# Altium PCB extensionboard.PcbDoc
Units mm, origin at the board's own origin, x right, y up, seen from the top; angles counter-clockwise.
Board outline 95 x 100 mm, 2 copper layers (Top Layer, Bottom Layer); 96 components, 80 nets, 406 pads, 34 vias.
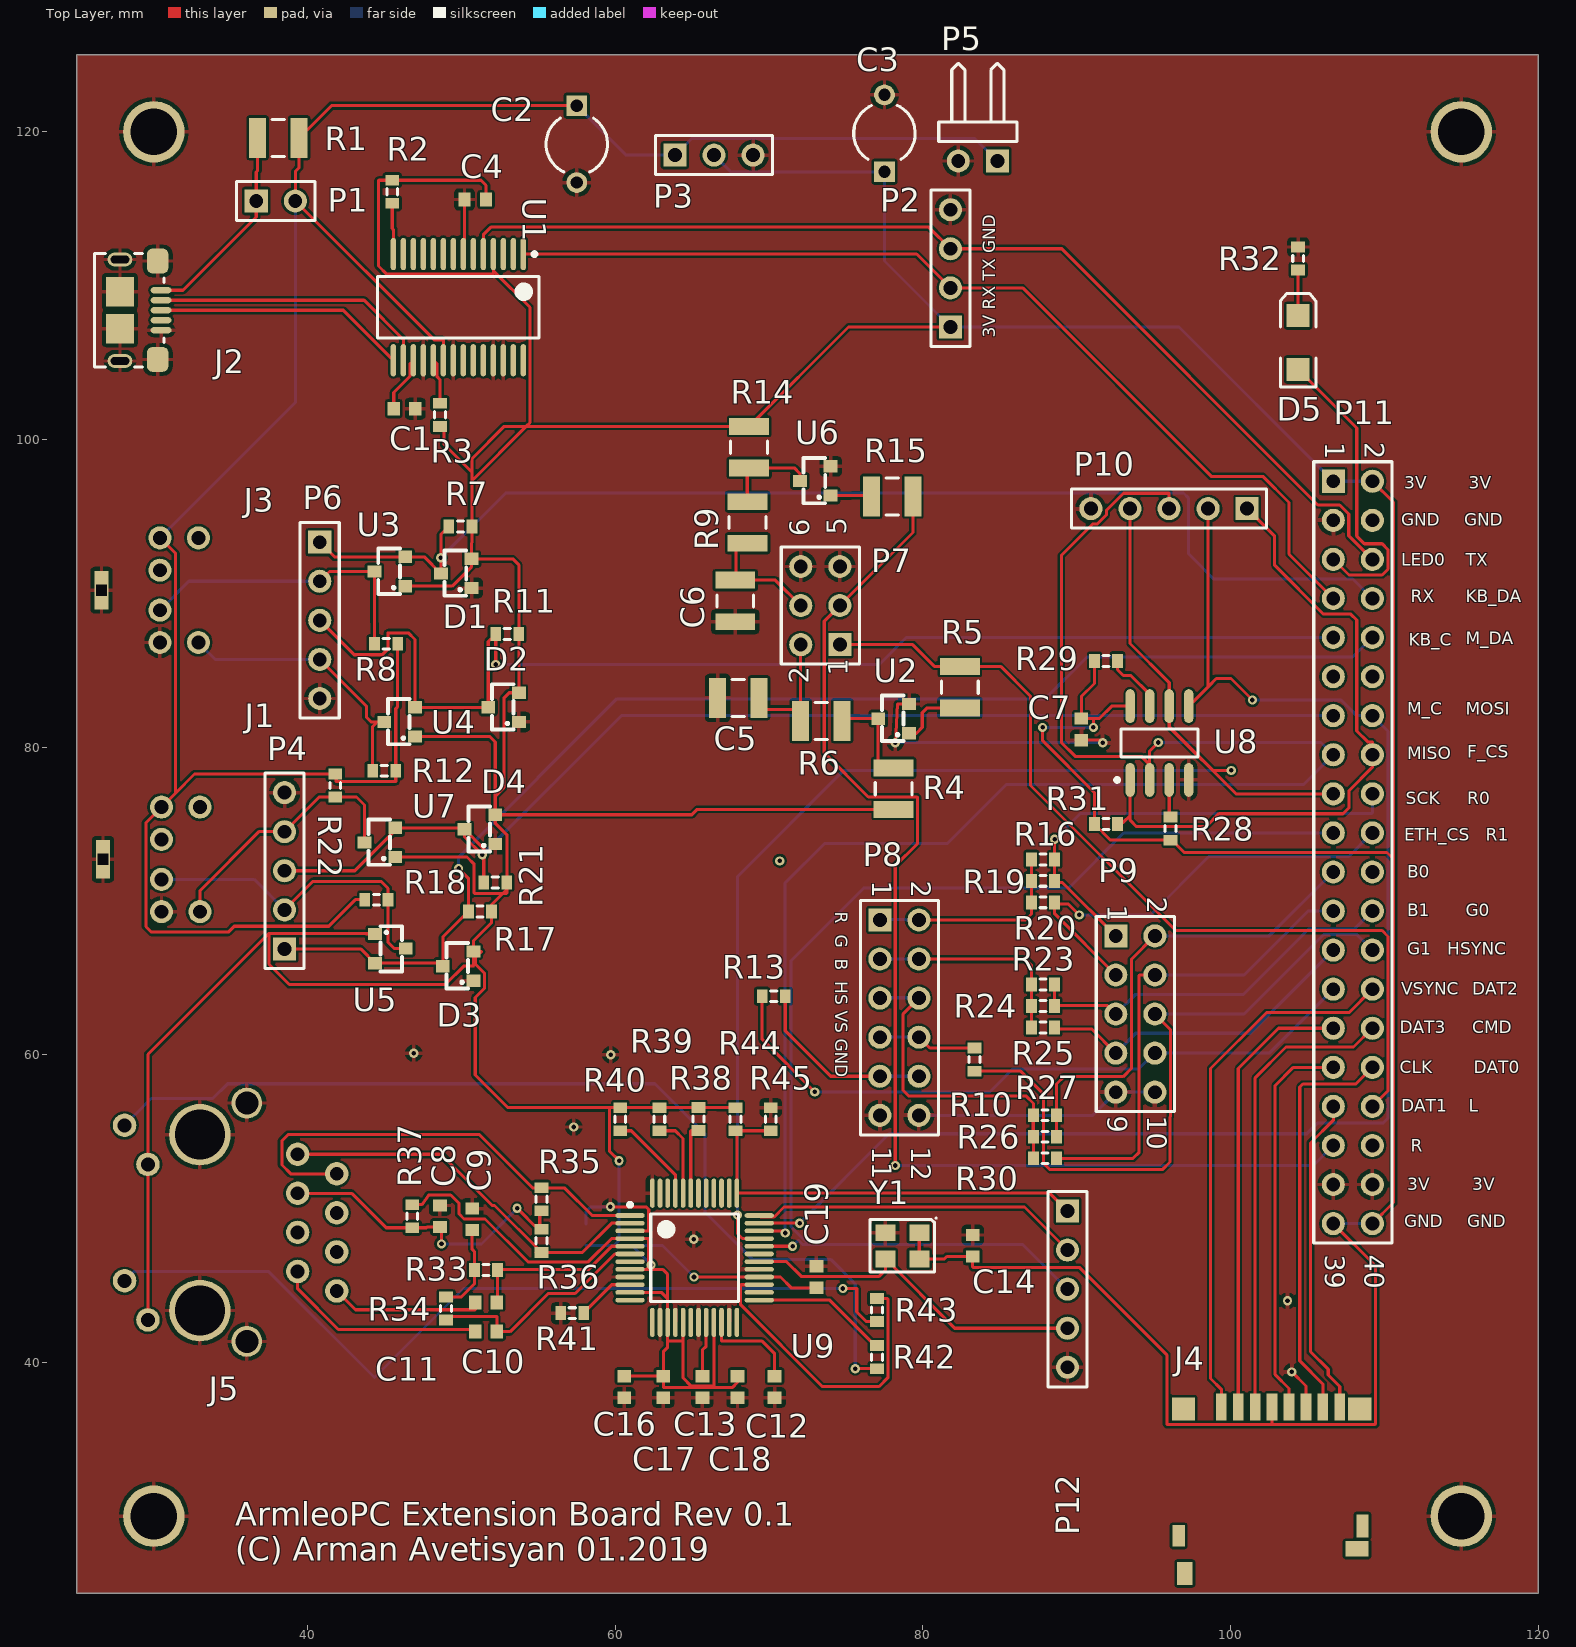
[diagram p0: Top Layer view]
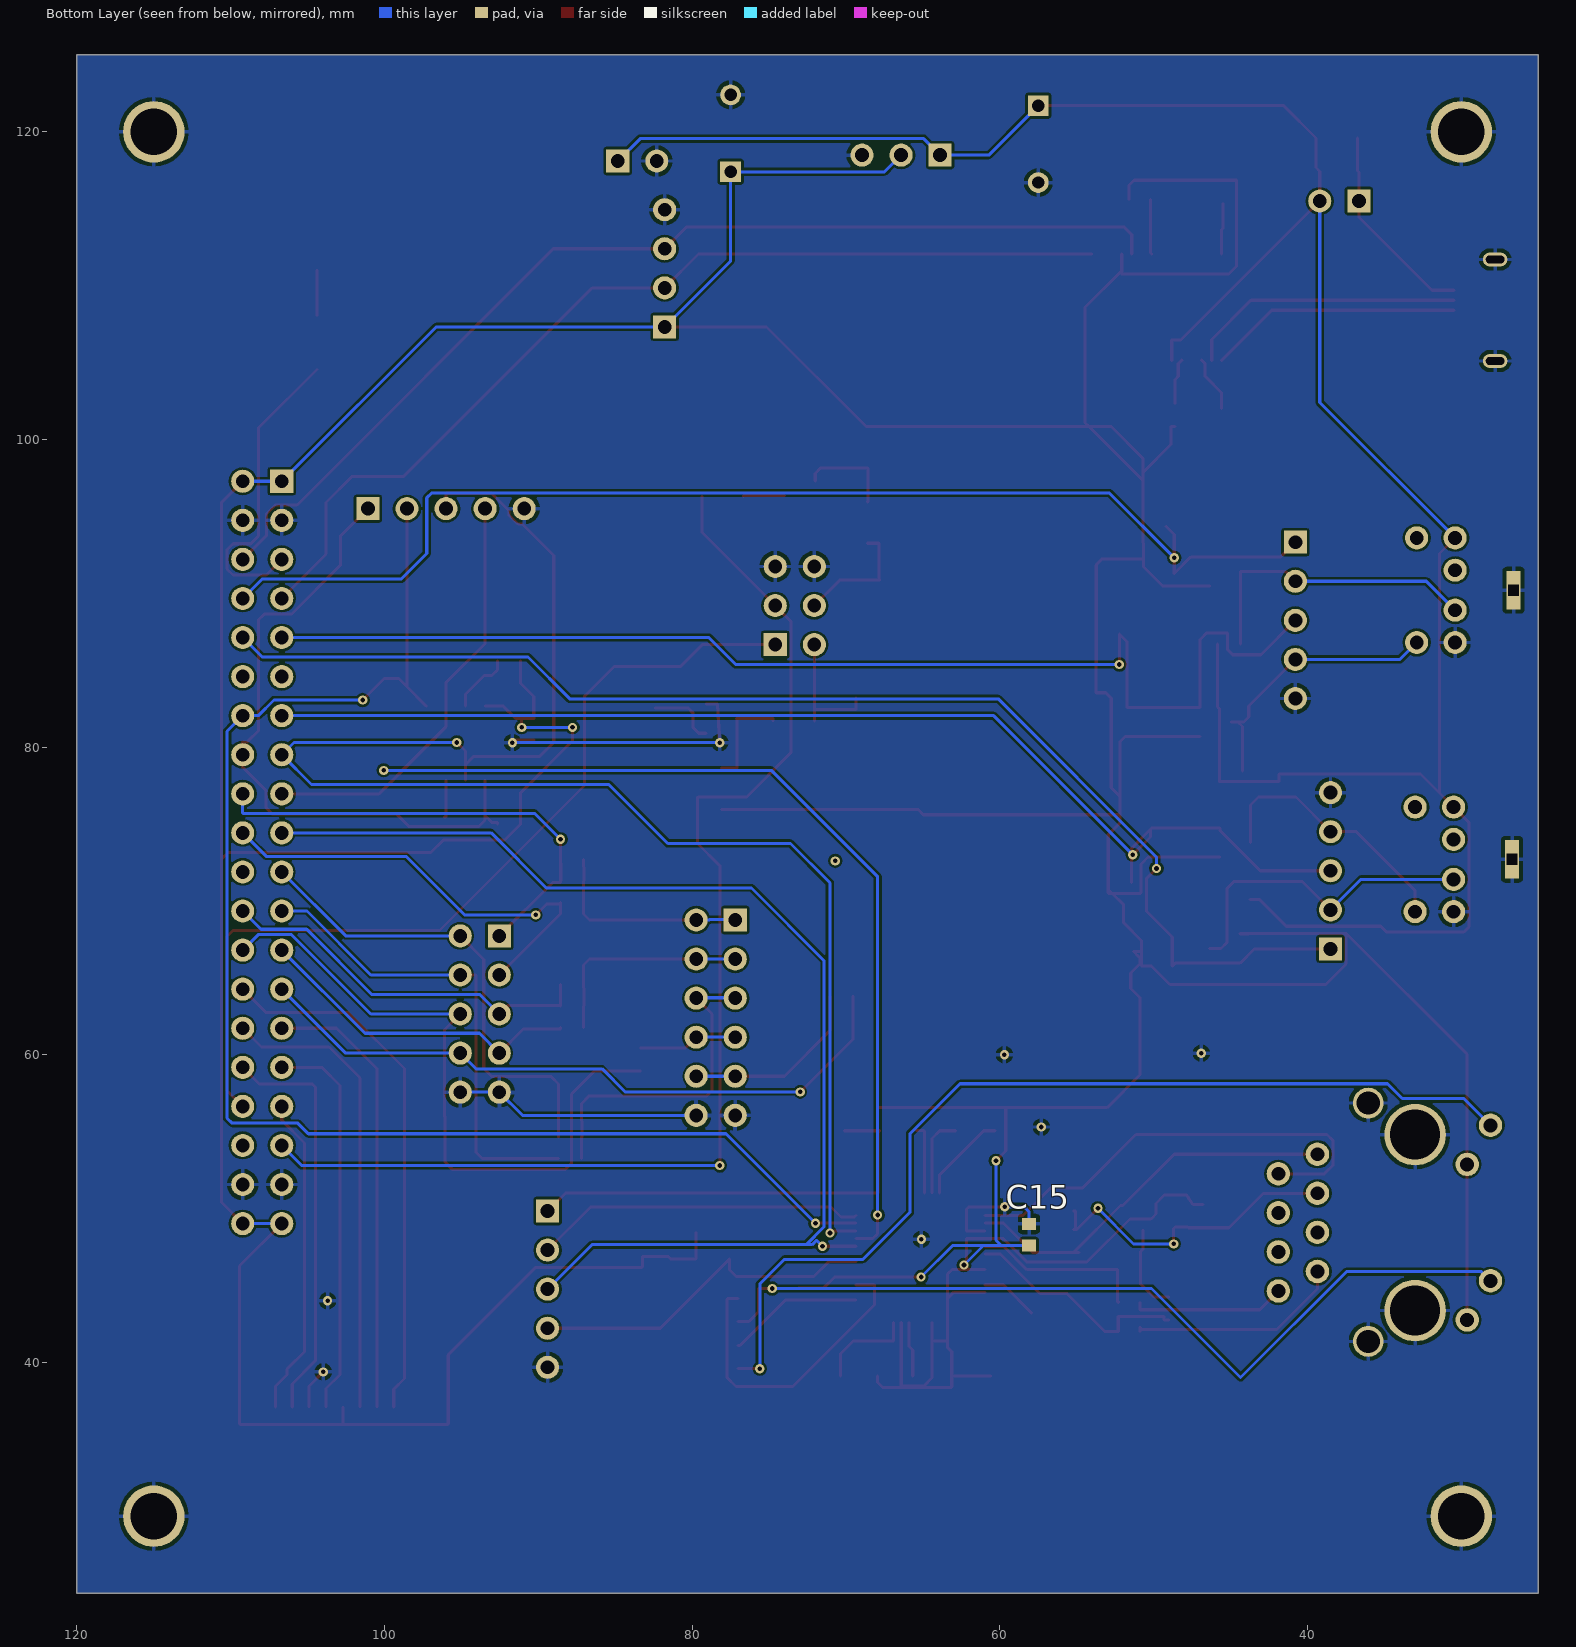
[diagram p1: Bottom Layer view, seen from below]

## Layer stack, top to bottom
Top Solder: solder mask 0.0102, Solder Resist, Dk 3.5
Top Layer: signal copper 0.0356
Dielectric 1: dielectric 0.32, FR-4, Dk 4.8
Bottom Layer: signal copper 0.0356
Bottom Solder: solder mask 0.0102, Solder Resist, Dk 3.5

## Board outline
25,25 25,125 120,125 120,25

## Design rules (kind name [scope] priority, off if disabled: settings)
Clearance [All] p1: gap=0.152 ignorepadtopadclearanceinfootprint=FALSE
PolygonConnect [All] p1: connectstyle=Relief reliefconductorwidth=0.254 reliefentries=4 polygonreliefangle="90 Angle" airgapwidth=0.254
RoomDefinition extensionboard [InComponentClass('extensionboard')] p1: confinementstyle=ConfineIn formatcopy=TRUE lockcomponents=FALSE outline 20,25 120,25 120,125 20,125
RoutingVias [All] p1: holewidth=0.3 width=0.6 viastyle="Through Hole" minholewidth=0.3 minwidth=0.6 maxholewidth=3 maxwidth=4
SolderMaskExpansion [All] p1: expansion=0.102
Width [All] p1: maxlimit=2 minlimit=0.152 preferedwidth=0.2
30 further rules are at their usual default settings.

## Components (designator, comment, footprint, x,y, rotation, side; value= is the part's Value field where it differs from the comment)
C1 "Cap Semi" 1608[0603] 46.3,102 r0 top value=100pF
C2 "Cap2" CAPR5-4X5 57.5,119.2 r270 top value=47uF
C3 "Cap2" CAPR5-4X5 77.5,119.9 r90 top value=47uF
C4 "Cap Semi" 1608[0603] 50.9,115.6 r180 top value=100pF
C5 "Cap Semi" C1210 68,83.2 r0 top value=PWMC0
C6 "Cap Semi" C1210 67.8,89.5 r90 top value=PWMC1
C7 "Cap Semi" 1608[0603] 90.297,81.153 r270 top value=0.1uF
C8 "Cap Semi" 1608[0603] 48.6,49.5 r270 top value=100nF
C9 "Cap Semi" 1608[0603] 50.7,49.3 r90 top value=10nF
C10 "Cap Semi" 1608[0603] 51.6,42 r0 top value=6.8nF
C11 "Cap Semi" 1608[0603] 51.6,43.9 r0 top value=6.8nF
C12 "Cap Semi" 1608[0603] 70.362,38.408 r90 top value=10nF
C13 "Cap Semi" 1608[0603] 65.663,38.408 r90 top value=4.7uF
C14 "Cap Semi" 1608[0603] 83.235,47.579 r270 top value=0.1uF
C15 "Cap Semi" 1608[0603] 58.1,48.3 r270 bottom value=0.1uF
C16 "Cap Semi" 1608[0603] 60.583,38.408 r90 top value=0.1uF
C17 "Cap Semi" 1608[0603] 63.123,38.408 r90 top value=0.1uF
C18 "Cap Semi" 1608[0603] 67.949,38.408 r90 top value=0.1uF
C19 "Cap Semi" 1608[0603] 73.075,45.547 r270 top value=0.1uF
D1 "Double Diode" SOT-23 48.661,91.287 r90 top
D2 "Double Diode" SOT-23 51.741,82.585 r90 top
D3 "Double Diode" SOT-23 48.788,65.76 r90 top
D4 "Double Diode" SOT-23 50.2,74.65 r90 top
D5 "LED2" 3.2X1.6X1.1 104.394,106.299 r90 top
J1 "Mouse" MD-60S 26.7,72.7 r90 top
J2 "USB Micro" "FCI USB 10118193-0001LF" 27.85,108.4 r90 top
J3 "Keyboard" MD-60S 26.6,90.2 r90 top
J4 "1140084168" 1140084168 108.575,26.062 r180 top
J5 "RJ45" RB1-125BAG1A 43.89,56.96 r270 top
P1 "Header 2" HDR1X2 36.66,115.5 r0 top
P2 "Header 4" HDR1X4 81.788,107.315 r90 top
P3 "Header 3" HDR1X3 63.878,118.484 r0 top
P4 "Header 5" HDR1X5 38.5,66.88 r90 top
P5 "Header 2H" HDR1X2H 84.84,118.1 r180 top
P6 "Header 5" HDR1X5 40.787,93.319 r270 top
P7 "Header 3X2" HDR2X3 74.6,86.66 r90 top
P8 "Header 6X2" HDR2X6 77.2,68.76 r270 top
P9 "Header 5X2" HDR2X5 92.539,67.726 r270 top
P10 "Header 5" HDR1X5 101.08,95.5 r180 top
P11 "Header 20X2" HDR2X20 106.68,97.282 r270 top
P12 "Header 5" HDR1X5 89.4,49.84 r270 top
R1 "Res3" 14-1210 38.1,119.6 r180 top value=0
R2 "Res3" J1-0603 45.5,116.1 r90 top value=10K
R3 "Res3" J1-0603 48.6,101.6 r90 top value=10K
R4 "Res3" 14-1210 78.1,77.3 r90 top value=100
R5 "Res3" 14-1210 82.4,83.9 r270 top value=100
R6 "Res3" 14-1210 73.4,81.7 r0 top value=PWMR0
R7 "Res3" J1-0603 49.931,94.335 r0 top value=10K
R8 "Res3" J1-0603 45.105,86.715 r0 top value=10K
R9 "Res3" 14-1210 68.6,94.6 r90 top value=PWMR1
R10 "Res3" J1-0603 83.355,59.682 r270 top value=47
R11 "Res3" J1-0603 52.979,87.35 r0 top value=10K
R12 "Res3" J1-0603 44.978,78.46 r0 top value=10K
R13 "Res3" J1-0603 70.3,63.8 r180 top value=47
R14 "Res3" 14-1210 68.7,99.5 r270 top value=100
R15 "Res3" 14-1210 78,96.3 r180 top value=100
R16 "Res3" J1-0603 87.811,72.698 r180 top value=1K
R17 "Res3" J1-0603 51.201,69.316 r0 top value=10K
R18 "Res3" J1-0603 44.47,70.078 r180 top value=10K
R19 "Res3" J1-0603 87.811,71.301 r180 top value=1K
R20 "Res3" J1-0603 87.811,69.904 r180 top value=1K
R21 "Res3" J1-0603 52.2,71.2 r0 top value=10K
R22 "Res3" J1-0603 41.8,77.5 r90 top value=10K
R23 "Res3" J1-0603 87.811,64.57 r180 top value=1K
R24 "Res3" J1-0603 87.811,63.173 r180 top value=1K
R25 "Res3" J1-0603 87.811,61.776 r180 top value=1K
R26 "Res3" J1-0603 87.938,54.664 r180 top value=500
R27 "Res3" J1-0603 87.938,56.061 r180 top value=1K
R28 "Res3" J1-0603 96.1,74.7 r270 top value=1K
R29 "Res3" J1-0603 91.9,85.6 r180 top value=1K
R30 "Res3" J1-0603 87.938,53.267 r180 top value=1K
R31 "Res3" J1-0603 91.9,75 r180 top value=10K
R32 "Res3" J1-0603 104.394,111.76 r270 top value=500
R33 "Res3" J1-0603 51.6,46 r180 top value=49.9
R34 "Res3" J1-0603 49,43.5 r270 top value=49.9
R35 "Res3" J1-0603 55.2,50.6 r270 top value=49.9
R36 "Res3" J1-0603 55.2,47.9 r270 top value=49.9
R37 "Res3" J1-0603 46.8,49.5 r270 top value=10
R38 "Res3" J1-0603 65.409,55.819 r90 top value=1K
R39 "Res3" J1-0603 62.869,55.807 r90 top value=1K
R40 "Res3" J1-0603 60.329,55.807 r90 top value=1K
R41 "Res3" J1-0603 57.2,43.2 r180 top value=12.4K
R42 "Res3" J1-0603 77.012,40.34 r90 top value=330
R43 "Res3" J1-0603 77.012,43.4 r90 top value=330
R44 "Res3" J1-0603 67.822,55.807 r270 top value=1K
R45 "Res3" J1-0603 70.108,55.807 r270 top value=1K
U1 "FT232RL-Reel" SSOP-28_N 49.8,108.6 r270 top
U2 "BSS138" SOT-23 77.1,81.85 r90 top
U3 "BSS138" SOT-23 44.343,91.414 r90 top
U4 "BSS138" SOT-23 44.978,81.635 r90 top
U5 "BSS138" SOT-23 46.375,66.903 r270 top
U6 "BSS138" SOT-23 72,97.3 r90 top
U7 "BSS138" SOT-23 43.7,73.8 r90 top
U8 "M25P16-VMN3PB" MICT-MN-8_N 95.377,80.264 r90 top
U9 "W5500" LQFP-48 65.159,46.799 r0 top
Y1 "Abracon XO ASE" "ABRACON ASE" 78.663,47.579 r180 top

## Footprints (in the part's own frame and the unit in brackets; to place one, negate y for a bottom-side part, rotate by r counter-clockwise, add the part's x,y. Pads: shape width x height; smd on the part's side, far side on the other; paste and mask are expansions set on the pad)
3.2X1.6X1.1 [mm] "SMT LED; 2 Flat Leads"
  rect 1.5x1.5 smd: 1(-1.75,0) 2(1.75,0)
  silkscreen extent -2.9,-1.15 3.2,1.15
14-1210 [mm] "Chip Resistor, Body 3.2x2.5mm, IPC High Density"
  rect 1.1x2.6 smd: 1(-1.35,0) 2(1.35,0)
  silkscreen extent -0.4,-1.2 0.4,1.2, body extent -1.68,-1.32 1.68,1.32, height 0.9
1608[0603] [mm] "Chip Capacitor, Body 1.6x0.8mm, IPC High Density"
  rect 0.8x0.9 smd: 1(-0.7,0) 2(0.7,0)
  body extent -0.87,-0.48 0.87,0.48, height 1.3
1140084168 [mm]
  rect 0.7x1.75 smd: 1(9.175,-11.038) 6(3.675,-11.038)
  rect 0.701x1.753 smd: 2(8.075,-11.038) 8(1.475,-11.038)
  rect 0.701x1.752 smd: 3(6.975,-11.038) 4(5.875,-11.038) 5(4.775,-11.038) 7(2.575,-11.038)
  rect 1.501x1.501 smd: 9(0.175,-10.913)
  rect 1.502x1.502 smd: 10(11.625,-10.913)
  rect 0.801x1.501 smd: 11(0,-3.313)
  rect 0.8x1.401 smd: 12(11.95,-2.663)
  rect 1.5x1 smd: 13(0.355,-1.813)
  rect 1.001x1.502 smd: 14(11.55,-0.213)
"ABRACON ASE" [mm] "Crystal, 4-Leads, Body 2.50x3.20mm, Pitch 2.20mm, IPC Medium Density"
  rect 1.3x1.1 smd: 1(-1.1,-0.85) 2(1.1,-0.85) 3(1.1,0.85) 4(-1.1,0.85)
  silkscreen extent -2.25,-1.85 2.1,1.7, body extent -1.62,-1.27 1.63,1.28, height 1.2
C1210 [mm] "Chip Capacitor, Body 3.2x2.5mm, IPC High Density"
  rect 1.1x2.6 smd: 1(-1.35,0) 2(1.35,0)
  silkscreen extent -0.4,-1.2 0.4,1.2, body extent -1.7,-1.35 1.7,1.35, height 1.3
CAPR5-4X5 [mm] "Capacitor; 2 Leads"
  rect 1.35x1.35 hole 0.8: 1(-2.5,0)
  round 1.35 hole 0.8: 2(2.5,0)
  silkscreen extent -1.69,-2 1.82,2
"FCI USB 10118193-0001LF" [mm] "USB 2.0 Type B Micro"
  oval 0.4x1.35 smd: 1(1.3,-2.625) 2(0.65,-2.625) 3(0,-2.625) 4(-0.65,-2.625) 5(-1.3,-2.625)
  oval 0.9x1.6 hole 0.5 slot 1.2 at 90 deg: S(-3.3,0.05) S(3.3,0.05)
  rrect50% 1.6x1.4 smd: S(-3.2,-2.4) S(3.2,-2.4)
  rect 1.9x1.8 smd: S(-1.2,0.05) S(1.2,0.05)
  silkscreen extent -3.7,-2.8 3.7,1.7
HDR1X2 [mm] "Connector; Header; 2 Position"
  rect 1.5x1.5 hole 0.9: 1(0,0)
  round 1.5 hole 0.9: 2(2.54,0)
  silkscreen extent -1.27,-1.27 3.81,1.27
HDR1X2H [mm] "Connector; Header; 2 Position; Right Angle"
  rect 1.5x1.5 hole 0.9: 1(0,0)
  round 1.5 hole 0.9: 2(2.54,0)
  silkscreen extent -1.27,-6.35 3.81,-1.27
HDR1X3 [mm] "Connector; Header; 3 Position"
  rect 1.5x1.5 hole 0.9: 1(0,0)
  round 1.5 hole 0.9: 2(2.54,0) 3(5.08,0)
  silkscreen extent -1.27,-1.27 6.35,1.27
HDR1X4 [mm] "Connector; Header; 4 Position"
  rect 1.5x1.5 hole 0.9: 1(0,0)
  round 1.5 hole 0.9: 2(2.54,0) 3(5.08,0) 4(7.62,0)
  silkscreen extent -1.27,-1.27 8.89,1.27
HDR1X5 [mm] "Connector; Header; 5 Position"
  rect 1.5x1.5 hole 0.9: 1(0,0)
  round 1.5 hole 0.9: 2(2.54,0) 3(5.08,0) 4(7.62,0) 5(10.16,0)
  silkscreen extent -1.27,-1.27 11.43,1.27
HDR2X3 [mm] "Connector; Header; 3x2 Position"
  rect 1.5x1.5 hole 0.9: 1(0,0)
  round 1.5 hole 0.9: 2(0,2.54) 3(2.54,0) 4(2.54,2.54) 5(5.08,0) 6(5.08,2.54)
  silkscreen extent -1.27,-1.27 6.35,3.81
HDR2X5 [mm] "Connector; Header; 5x2 Position"
  rect 1.5x1.5 hole 0.9: 1(0,0)
  round 1.5 hole 0.9: 2(0,2.54) 3(2.54,0) 4(2.54,2.54) 5(5.08,0) 6(5.08,2.54) 7(7.62,0) 8(7.62,2.54) 9(10.16,0) 10(10.16,2.54)
  silkscreen extent -1.27,-1.27 11.43,3.81
HDR2X6 [mm] "Connector; Header; 6x2 Position"
  rect 1.5x1.5 hole 0.9: 1(0,0)
  round 1.5 hole 0.9: 2(0,2.54) 3(2.54,0) 4(2.54,2.54) 5(5.08,0) 6(5.08,2.54) 7(7.62,0) 8(7.62,2.54) 9(10.16,0) 10(10.16,2.54) 11(12.7,0) 12(12.7,2.54)
  silkscreen extent -1.27,-1.27 13.97,3.81
HDR2X20 [mm] "Connector; Header; 20x2 Position"
  rect 1.5x1.5 hole 0.9: 1(0,0)
  round 1.5 hole 0.9: 2(0,2.54) 3(2.54,0) 4(2.54,2.54) 5(5.08,0) 6(5.08,2.54) 7(7.62,0) 8(7.62,2.54) 9(10.16,0) 10(10.16,2.54) 11(12.7,0) 12(12.7,2.54) 13(15.24,0) 14(15.24,2.54) 15(17.78,0) 16(17.78,2.54) 17(20.32,0) 18(20.32,2.54) 19(22.86,0) 20(22.86,2.54) 21(25.4,0) 22(25.4,2.54) 23(27.94,0) 24(27.94,2.54) 25(30.48,0) 26(30.48,2.54) 27(33.02,0) 28(33.02,2.54) 29(35.56,0) 30(35.56,2.54) 31(38.1,0) 32(38.1,2.54) 33(40.64,0) 34(40.64,2.54) 35(43.18,0) 36(43.18,2.54) 37(45.72,0) 38(45.72,2.54) 39(48.26,0) 40(48.26,2.54)
  silkscreen extent -1.27,-1.27 49.53,3.81
J1-0603 [mm] "Chip Resistor, Body 1.6x0.8mm, IPC High Density"
  rect 0.7x0.9 smd: 1(-0.75,0) 2(0.75,0)
  silkscreen extent -0.2,-0.35 0.2,0.35, body extent -0.85,-0.48 0.85,0.48, height 0.9
LQFP-48 [mm] "TSQFP, 48-Leads, Body 9,0x9,0mm (max), Pitch 0,50mm, IPC Medium Density"
  oval 1.9x0.3 smd: 1(-4.2,2.75) 2(-4.2,2.25) 3(-4.2,1.75) 4(-4.2,1.25) 5(-4.2,0.75) 6(-4.2,0.25) 7(-4.2,-0.25) 8(-4.2,-0.75) 9(-4.2,-1.25) 10(-4.2,-1.75) 11(-4.2,-2.25) 12(-4.2,-2.75) 25(4.2,-2.75) 26(4.2,-2.25) 27(4.2,-1.75) 28(4.2,-1.25) 29(4.2,-0.75) 30(4.2,-0.25) 31(4.2,0.25) 32(4.2,0.75) 33(4.2,1.25) 34(4.2,1.75) 35(4.2,2.25) 36(4.2,2.75)
  oval 0.3x1.9 smd: 13(-2.75,-4.2) 14(-2.25,-4.2) 15(-1.75,-4.2) 16(-1.25,-4.2) 17(-0.75,-4.2) 18(-0.25,-4.2) 19(0.25,-4.2) 20(0.75,-4.2) 21(1.25,-4.2) 22(1.75,-4.2) 23(2.25,-4.2) 24(2.75,-4.2) 37(2.75,4.2) 38(2.25,4.2) 39(1.75,4.2) 40(1.25,4.2) 41(0.75,4.2) 42(0.25,4.2) 43(-0.25,4.2) 44(-0.75,4.2) 45(-1.25,4.2) 46(-1.75,4.2) 47(-2.25,4.2) 48(-2.75,4.2)
  silkscreen extent -4.32,-2.85 2.85,3.57, body extent -4.5,-4.5 4.5,4.5, height 1.5
MD-60S [mm]
  rect 2.5x0.9 hole 0.7 square: 0(0,0)
  round 1.5 hole 0.9: 1(-1.3,-3.8) 2(1.3,-3.8) 3(-3.4,-3.8) 4(3.4,-3.8) 5(-3.4,-6.3) 6(3.4,-6.3)
MICT-MN-8_N [mm] "SOIC, 8-Leads, Body 5x4mm, Pitch 1.27mm, IPC Medium Density"
  oval 2.2x0.6 smd: 1(-2.4,1.905) 2(-2.4,0.635) 3(-2.4,-0.635) 4(-2.4,-1.905) 5(2.4,-1.905) 6(2.4,-0.635) 7(2.4,0.635) 8(2.4,1.905)
  silkscreen extent -2.52,-2.5 0.9,2.88, body extent -2,-2.5 2,2.5, height 0.1
RB1-125BAG1A [mm] "MAGJACK RJ45"
  round 1.524 hole 0.9: L1(14.2,-14.27) L2(11.66,-15.79) L3(4.09,-14.27) L4(1.55,-15.79) R1(3.43,-4.54) R2(4.7,-2) R3(5.97,-4.54) R4(7.24,-2) R5(8.51,-4.54) R6(9.78,-2) R7(11.05,-4.54) R8(12.32,-2)
  round 2 hole 1.5: S(0.1,-7.84) S(15.6,-7.84)
  round 4 hole 3.25: S(2.16,-10.89) S(13.59,-10.89)
  Mechanical 1 keep-out region: 12.99,-10.89 14.19,-10.89 14.19,-5.49 12.99,-5.49
  Mechanical 1 keep-out region: 1.56,-10.89 2.76,-10.89 2.76,-5.49 1.56,-5.49
SOT-23 [mm]
  rect 0.8x0.9 smd: 1(-0.95,-2) 2(0.95,-2) 3(0,0)
  silkscreen extent -1.45,-1.65 1.5,-0.25
SSOP-28_N [mm] "SOP, 28-Leads, Body 10.2x5.3mm, Pitch 0.65mm, IPC Medium Density"
  oval 2.1x0.35 smd: 1(-3.45,4.225) 2(-3.45,3.575) 3(-3.45,2.925) 4(-3.45,2.275) 5(-3.45,1.625) 6(-3.45,0.975) 7(-3.45,0.325) 8(-3.45,-0.325) 9(-3.45,-0.975) 10(-3.45,-1.625) 11(-3.45,-2.275) 12(-3.45,-2.925) 13(-3.45,-3.575) 14(-3.45,-4.225) 15(3.45,-4.225) 16(3.45,-3.575) 17(3.45,-2.925) 18(3.45,-2.275) 19(3.45,-1.625) 20(3.45,-0.975) 21(3.45,-0.325) 22(3.45,0.325) 23(3.45,0.975) 24(3.45,1.625) 25(3.45,2.275) 26(3.45,2.925) 27(3.45,3.575) 28(3.45,4.225)
  silkscreen extent -3.57,-5.25 2,5.25, body extent -2.8,-5.25 2.8,5.25, height 2

## Part data
C1 C4 C5 C6 C7 C8 C9 C10 C11 C12 C13 C14 C15 C16 C17 C18 C19: "Capacitor (Semiconductor SIM Model)", LatestRevisionDate=29-May-2009, LatestRevisionNote="IPC-7351 Footprint Added.", PackageDescription="Chip Capacitor", PackageReference=C1206, Published=8-Jun-2000, Publisher="Altium Limited"
C2 C3: "Capacitor", PackageDescription="Capacitor; 2 Leads", PackageReference=CAPR5-4X5, Published=23-Sep-2002, Publisher="Altium Limited"
D1 D2 D3 D4: library part BAT54S
D5: "Typical RED, GREEN, YELLOW, AMBER GaAs LED", LatestRevisionDate=17-Jul-2002, LatestRevisionNote="Re-released for DXP Platform.", PackageDescription="SM LED; 2 Flat Leads", PackageReference=3.2X1.6X1.1, PackageVersion=Feb-2002, Published=8-Jun-2000, Publisher="Altium Limited"
J1 J3: library part MD60S
J2: library part "USB 2.0 Type B Micro"
J4: "Memory Card Connector, Microsd, 8 Position, Full Reel", Package=None, Digi-Key_Part_Number=114-00841-68-1-ND, Digi-Key_Purchase_URL=https://www.digikey.com/product-detail/en/amphenol-icc-commercial-products/114-00841-68/114-00841-68-1-ND/2187101?utm_source=snapeda&utm_medium=aggregator&utm_campaign=symbol, MF="Amphenol ICC", MP=114-00841-68, SnapEDA_Link=https://www.snapeda.com/parts/114-00841-68/Amphenol%20ICC/view-part/?ref=snap
P1: "Header, 2-Pin", LatestRevisionDate=17-Jul-2002, LatestRevisionNote="Re-released for DXP Platform.", Publisher="Altium Limited"
P2: "Header, 4-Pin", LatestRevisionDate=17-Jul-2002, LatestRevisionNote="Re-released for DXP Platform.", Publisher="Altium Limited"
P3: "Header, 3-Pin", LatestRevisionDate=17-Jul-2002, LatestRevisionNote="Re-released for DXP Platform.", Publisher="Altium Limited"
P4 P6 P10 P12: "Header, 5-Pin", LatestRevisionDate=17-Jul-2002, LatestRevisionNote="Re-released for DXP Platform.", Publisher="Altium Limited"
P5: "Header, 2-Pin, Right Angle", LatestRevisionDate=17-Jul-2002, LatestRevisionNote="Re-released for DXP Platform.", Publisher="Altium Limited"
P7: "Header, 3-Pin, Dual row", LatestRevisionDate=17-Jul-2002, LatestRevisionNote="Re-released for DXP Platform.", Publisher="Altium Limited"
P8: "Header, 6-Pin, Dual row", LatestRevisionDate=17-Jul-2002, LatestRevisionNote="Re-released for DXP Platform.", Publisher="Altium Limited"
P9: "Header, 5-Pin, Dual row", LatestRevisionDate=17-Jul-2002, LatestRevisionNote="Re-released for DXP Platform.", Publisher="Altium Limited"
P11: "Header, 20-Pin, Dual row", LatestRevisionDate=17-Jul-2002, LatestRevisionNote="Re-released for DXP Platform.", Publisher="Altium Limited"
R1 R2 R3 R4 R5 R6 R7 R8 R9 R10 R11 R12 R13 R14 R15 R16 R17 R18 R19 R20 R21 R22 R23 R24 R25 R26 R27 R28 R29 R30 R31 R32 R33 R34 R35 R36 R37 R38 R39 R40 R41 R42 R43 R44 R45: "Resistor", LatestRevisionDate=29-May-2009, LatestRevisionNote="IPC-7351 Footprint Added.", PackageDescription="Chip Resistor", PackageReference=J1-0603, Published=8-Jun-2000, Publisher="Altium Limited"
U1: "USB UART Asynchronous Serial Data Transfer Chip, 28-pin SSOP, Tape and Reel", Manufacturer=FTDI, ComponentLink1Description="Manufacturer URL", ComponentLink1URL=http://www.ftdichip.com/, ComponentLink2Description=Datasheet, ComponentLink2URL=http://www.ftdichip.com/Support/Documents/DataSheets/ICs/DS_FT232R.pdf, DatasheetVersion="ver 2.10, Mar-2012", PackageDescription="28-Pin Small Outline Package 0.65 mm Pitch", PackageReference=SSOP-28, PackageVersion=Mar-12, PartNumber=FT232RL-Reel
U2 U3 U4 U5 U6 U7: "BSS138 SOT-23"
U8: "16 Mb (x1) Automotive Serial NOR Flash Memory, 75 MHz, 2.7 to 3.6 V, 8-pin SO8 Narrow (MN), Tube", Manufacturer=Micron, Package="SO8 Narrow", Voltage=2.7V-3.6V, Applications=Automotive, ComponentLink1Description="Manufacturer URL", ComponentLink1URL=http://www.micron.com/, ComponentLink2Description=Datasheet, ComponentLink2URL=http://www.micron.com/~/media/Documents/Products/Data%20Sheet/NOR%20Flash/Serial%20NOR/M25P/M25P16.pdf, ComponentLink3Description="Package Specification", ComponentLink3URL=http://www.micron.com/~/media/Documents/Products/Data%20Sheet/NOR%20Flash/Serial%20NOR/M25P/M25P05A.pdf, DatasheetVersion="Rev. Y", Density=16Mb, Mounting Technology="Surface Mount", PackageDescription="8-Pin SO Narrow, 3.9 X 4.9 mm, Pitch 1.27 mm", PackageReference=MICT-MN-8, PackageVersion="Rev 11", Part Family=M25P, PartNumber=M25P16-VMN3PB, Part Status=Production, RoHS=Yes, Speed="75 MHz", Type="Data Storage", Width=x1
U9: "W5500 LQFP-48"
Y1: "SMD CMOS Crystal Oscillator"

## Free pads (board coordinates)
  round 4 hole 3: 1(30,30) 2(30,120) 2(115,30) 2(115,120)

## Via types
v1: diameter 0.6, hole 0.3, Top Layer to Bottom Layer, 34 vias

## Nets (pads, with @x,y where several pads share a name; then routed paths per layer and width w, separated by ;. In a path a pad name is that pad's centre, name@x,y a point inside that pad or via, vN(x,y) a via of type N, cw(c..) or ccw(c..) an arc to the next point about the centre after c; other vN are vias at no path point)
3.3V: C3.1 C4.1 C7.1 C14.2 C15.2 C16.2 C17.2 C18.2 C19.2 D1.2 D2.2 D3.2 D4.2 J4.4 J5.L1 J5.L3 P2.1 P3.2 P11.1 P11.2 P11.39 P11.40 R2.2 R3.1 R4.1 R7.2 R11.2 R14.1 R17.2 R21.2 R28.2 R29.2 R31.2 R37.1 R38.2 R39.2 R40.2 R44.1 U1.4 U3.1 U4.1 U5.1 U7.1 U8.8 U9.4 U9.8 U9.11 U9.15 U9.17 U9.21 U9.28 Y1.1 Y1.4 | length 525.2
  Top Layer w0.2: J5.L1 J5.L3 29.62,60.024 37.49,67.894 37.516,67.894 ; U7.1 50.365,72.85 50.825,72.39 50.825,70.51 50.851,70.485 52.688,70.485 ; U3.1 49.392,90.464 50.661,91.733 D1.2 ; R37.1 47.447,50.25 47.866,50.876 49.301,50.876 49.847,50.33 49.847,49.644 50.165,49.327 51.537,49.327 54.331,46.533 58.252,46.533 59.768,48.049 U9.4 62.154,48.049 62.179,48.024 v1@62.179,46.177 ; U4.1 51.843,80.685 52.2,80.328 52.2,76.81 ; R3.1 48.87,100.85 48.87,99.678 50.681,97.866 ; C4.1 51.6,116.522 51.272,116.85 R2.2 44.628,116.85 44.602,116.825 44.602,111.277 45.136,110.744 52.05,110.744 52.075,110.769 52.075,110.968 ; U1.4 52.075,110.968 ; v1(60.249,53.111) 59.614,53.746 59.614,56.532 59.639,56.557 ; C16.2 C17.2 ; U9.11 62.993,44.549 63.409,44.133 ; U9.8 62.051,46.049 ; v1(62.332,46.33) v1@62.179,46.177 ; U9.17 64.409,41.402 ; v1(65.119,45.549) U9.28 70.739,45.549 71.441,44.847 C19.2 ; U9.21 66.409,38.481 66.384,38.456 64.948,38.456 64.409,38.994 64.409,41.402 ; R44.1 66.611,56.557 66.599,56.569 R38.2 64.122,56.569 64.11,56.557 R39.2 R40.2 59.639,56.557 ; C18.2 67.949,38.701 67.627,38.379 63.148,38.379 63.123,38.405 C17.2 ; R4.1 65.323,75.95 64.973,75.6 D4.2 ; Y1.1 Y1.4 81.407,46.729 81.557,46.879 C14.2 83.235,46.203 83.26,46.177 90.17,46.177 95.86,40.488 95.86,35.992 95.885,35.966 102.675,35.966 102.7,35.992 ; P2.1 75.165,107.315 R14.1 54.216,100.85 ; v1(87.782,81.28) 87.782,80.406 91.15,77.038 R31.2 92.2,73.95 R28.2 96.19,73.95 96.988,73.152 110.172,73.152 110.592,72.733 ; v1(91.084,81.28) 91.084,81.802 91.034,81.853 ; R29.2 91.15,84.14 90.297,83.287 C7.1 91.034,81.853 ; U8.8 92.276,82.664 91.465,81.853 91.034,81.853 ; J4.4 102.7,35.992 ; P11.39 109.423,46.279 109.423,35.992 109.398,35.966 102.725,35.966 102.7,35.992 ; P11.40 110.592,50.394 110.592,72.733 ; P11.2 110.592,95.91 110.592,72.733 ; 37.516,67.894 43.764,67.894 ; 37.516,67.894 37.49,67.869 37.49,65.888 38.811,64.567 48.946,64.567 50.14,65.761 50.763,65.761 50.788,65.786 D3.2 ; 43.764,67.894 44.375,67.894 U5.1 43.805,67.853 43.764,67.894 ; D1.2 53.34,92.237 53.729,91.848 R11.2 53.729,85.432 53.741,85.42 D2.2 53.106,83.535 52.756,83.185 52.756,77.365 52.2,76.81 ; D1.2 50.661,93.269 50.681,93.289 R7.2 50.681,97.315 ; 50.681,97.315 54.216,100.85 ; 50.681,97.315 50.681,97.866 ; 50.681,97.866 50.681,98.755 52.776,100.85 54.216,100.85 ; D3.2 51.311,66.71 50.9,66.299 50.9,65.904 51.49,65.314 51.49,64.306 50.9,63.716 50.9,58.68 53.023,56.557 59.639,56.557 ; D3.2 50.788,67.412 51.951,68.575 R17.2 51.951,69.748 52.688,70.485 ; 52.075,110.968 54.458,108.585 54.458,101.092 54.216,100.85 ; D4.2 52.2,75.054 52.95,74.304 R21.2 52.95,70.747 ; D4.2 52.2,76.81 ; 52.688,70.485 52.925,70.485 52.95,70.51 52.95,70.747 ; 52.688,70.485 52.95,70.747 ; 62.051,46.049 v1@62.179,46.177 ; 62.051,46.049 62.154,46.049 ; 62.154,46.049 63.08,46.049 63.409,45.72 63.409,44.133 ; 62.154,46.049 62.179,46.074 v1@62.179,46.177 ; C17.2 63.123,40.691 63.409,40.977 63.409,41.402 ; 63.409,41.402 U9.15 63.409,44.133 ; 63.409,41.402 63.434,41.377 64.384,41.377 64.409,41.402
  Bottom Layer w0.2: C15.2 59.906,47.6 ; v1(60.249,53.111) 60.249,47.942 59.906,47.6 ; v1(62.332,46.33) 61.061,47.6 ; v1(65.119,45.549) 63.068,47.6 61.061,47.6 ; P3.2 67.502,117.4 C3.1 77.5,111.603 P2.1 96.647,107.315 P11.1 P11.2 ; v1(87.782,81.28) v1(91.084,81.28) ; P11.39 P11.40 ; 59.906,47.6 61.061,47.6
5V: C2.1 J1.4 J3.4 P1.2 P3.1 P5.1 R1.1 R8.2 R12.2 R18.2 R22.2 U1.20 | length 159.1
  Top Layer w0.2: J3.4 31.42,92.58 31.42,77.02 ; R18.2 43.104,70.079 41.377,68.351 35.23,68.351 34.849,67.97 29.845,67.97 29.489,68.326 29.489,75.089 J1.4 31.42,77.02 ; R8.2 45.855,82.626 45.728,82.499 R12.2 45.728,77.775 45.703,77.749 41.885,77.749 41.859,77.775 41.859,78.25 R22.2 32.65,78.25 31.42,77.02 ; U1.20 48.825,106.451 48.8,106.477 48.223,106.477 P1.2 39.2,117.424 39.45,117.674 R1.1 41.55,121.7 C2.1
  Bottom Layer w0.2: J3.4 39.2,102.4 P1.2 ; C2.1 60.716,118.484 P3.1 64.952,119.558 83.382,119.558 P5.1
5VUSB: J2.1 P1.1 R1.2 | length 13.3
  Top Layer w0.2: J2.1 31.9,109.7 36.66,114.46 P1.1 36.66,117.385 36.75,117.475 R1.2
CT: C8.2 J5.R3 R35.2 R36.1 R37.2 | length 20.7
  Top Layer w0.2: J5.R3 42.863,50.99 45.103,48.75 R37.2 47.727,48.75 47.777,48.8 C8.2 48.7,48.7 v1(48.7,47.7) ; v1(53.619,50.013) 54.982,48.65 R36.1@55.093,48.65 ; R36.1 R36.1@55.093,48.65 ; R35.2 55.093,49.85 R36.1@55.093,48.65
  Bottom Layer w0.2: v1(48.7,47.7) 51.307,47.7 v1(53.619,50.013)
DIG_B0: P9.2 P11.21 R26.1 R27.1 | length 31.3
  Top Layer w0.2: R26.1 R27.1 88.688,58.102 89.158,58.572 93.015,58.572 93.548,59.106 93.548,66.195 P9.2
  Bottom Layer w0.2: P9.2 102.524,67.726 P11.21
DIG_B1: P9.4 P11.23 R30.1 | length 31.4
  Top Layer w0.2: R30.1 88.688,53.264 93.662,53.264 94.056,53.657 94.056,65.161 94.082,65.186 P9.4
  Bottom Layer w0.2: P9.4 100.886,65.186 105.042,69.342 P11.23
DIG_G0: P9.5 P11.24 R23.1 R24.1 | length 25.1
  Top Layer w0.2: R24.1 R24.1@88.561,63.195 ; R23.1 R24.1@88.561,63.195 ; P9.5 91.99,63.195 R24.1@88.561,63.195
  Bottom Layer w0.2: P9.5 93.799,63.906 100.813,63.906 105.062,68.156 108.034,68.156 P11.24
DIG_G1: P9.7 P11.25 R25.1 | length 21.6
  Top Layer w0.2: R25.1 88.561,61.671 90.974,61.671 P9.7
  Bottom Layer w0.2: P9.7 93.828,61.395 101.273,61.395 P11.25
DIG_HSYNC: P9.6 P11.26 R10.2 | length 44.9
  Top Layer w0.2: R10.2 86.356,58.932 87.833,57.455 87.833,52.959 88.265,52.527 95.567,52.527 96.063,53.023 96.063,55.956 96.088,55.982 96.088,61.637 P9.6
  Bottom Layer w0.2: P9.6 100.887,62.646 106.045,67.804 108.218,67.804 P11.26
DIG_R0: P9.1 P11.18 R16.1 R19.1 | length 30.9
  Top Layer w0.2: v1(88.561,74.007) R16.1 88.561,72.441 88.544,72.424 88.544,71.318 R19.1 88.561,71.196 89.069,71.196 P9.1
  Bottom Layer w0.2: v1(88.561,74.007) 90.246,75.692 109.195,75.692 109.22,75.717 P11.18
DIG_R1: P9.3 P11.20 R20.1 | length 29.5
  Top Layer w0.2: R20.1 R20.1@88.561,69.799 ; v1(90.17,69.088) 89.459,69.799 R20.1@88.561,69.799 ; P9.3 88.561,69.164 R20.1@88.561,69.799
  Bottom Layer w0.2: v1(90.17,69.088) 94.793,69.088 98.603,72.898 107.696,72.898 P11.20
DIG_VSYNC: P9.8 P11.27 R13.2 | length 44.1
  Top Layer w0.2: R13.2 69.55,61.006 v1(72.974,57.582)
  Bottom Layer w0.2: v1(72.974,57.582) 84.353,57.582 85.852,59.08 94.053,59.08 P9.8 102.524,60.106 P11.27
DUPLED: U9.26
FLASH_CS: P10.1 P11.16 R31.1 U8.1 | length 43.3
  Top Layer w0.2: R31.1 92.65,75.108 93.027,75.108 93.472,75.552 ; U8.1 93.472,75.552 ; P10.1 102.87,93.71 102.87,91.821 106.045,88.646 107.823,88.646 108.204,88.265 108.204,81.051 108.915,80.34 109.195,80.34 109.22,80.315 P11.16 109.22,78.689 107.696,77.165 107.696,76.048 107.315,75.667 99.238,75.667 98.4,74.828 93.891,74.828 93.472,75.248 93.472,75.552
FPGA_KBD_CLOCK: D2.3 P6.3 P11.9 R11.1 U4.2 | length 79.8
  Top Layer w0.2: P6.3 43.022,86.004 44.856,86.004 45.212,86.36 45.212,87.401 45.237,87.427 46.546,87.427 46.978,86.995 U4.2 D2.3 51.741,86.862 R11.1 v1(52.229,85.369)
  Bottom Layer w0.2: v1(52.229,85.369) 77.165,85.369 78.918,87.122 P11.9
FPGA_KBD_DATA: D1.3 P6.1 P11.8 R7.1 U3.2 | length 80.3
  Top Layer w0.2: P6.1 41.742,92.364 U3.2 47.584,92.364 D1.3 ; v1(48.661,92.304) D1.3 ; R7.1 48.661,93.815 D1.3
  Bottom Layer w0.2: v1(48.661,92.304) 52.877,96.52 96.939,96.52 97.257,96.203 97.257,92.583 98.908,90.932 107.95,90.932 P11.8
FPGA_MOUSE_CLOCK: D4.3 P4.3 P11.13 R21.1 U7.2 | length 78.2
  Top Layer w0.2: P4.3 43.066,71.96 45.7,74.594 U7.2 50.1,74.75 D4.3 ; v1(51.359,73) 50.2,74.158 D4.3 ; R21.1 51.45,73.4 D4.3
  Bottom Layer w0.2: v1(51.359,73) 60.401,82.042 P11.13
FPGA_MOUSE_DATA: D3.3 P4.1 P11.10 R17.1 U5.2 | length 84.1
  Top Layer w0.2: P4.1 43.448,66.88 U5.2 48.595,65.953 D3.3 48.788,67.653 R17.1 50.451,71.472 v1(49.816,72.107)
  Bottom Layer w0.2: v1(49.816,72.107) 49.816,72.847 60.103,83.134 87.96,83.134 90.678,85.852 107.95,85.852 P11.10
FPGA_PWM_LEFT: P7.1 P11.34 R5.1 | length 58.4
  Top Layer w0.2: P7.1 79.337,86.66 80.747,85.25 R5.1 85.05,85.25 86.995,83.305 86.995,77.505 96.428,68.072 109.855,68.072 110.236,67.691 110.236,57.658 P11.34
FPGA_PWM_RIGHT: P7.3 P11.35 R15.1 | length 79.9
  Top Layer w0.2: v1(78.202,52.802) 78.202,72.284 79.654,73.736 79.654,76.733 79.629,76.759 76.454,76.759 73.584,79.629 73.584,88.184 P7.3 79.35,93.95 R15.1
  Bottom Layer w0.2: v1(78.202,52.802) 105.38,52.802 P11.35
FPGA_RX: P2.2 P11.7 U1.1 | length 63.9
  Top Layer w0.2: U1.1 79.593,112.05 P2.2 86.487,109.855 98.742,97.6 102.1,97.6 103.8,95.9 103.8,92.542 P11.7
FPGA_TX: P2.3 P11.6 U1.5 | length 69
  Top Layer w0.2: U1.5 51.425,113.314 51.911,113.8 80.383,113.8 P2.3 89.027,112.395 105.678,95.744 107.095,95.744 107.682,95.157 107.682,93.74 P11.6
FT232_CLK: U1.23
GND: C1.2 C2.2 C3.2 C4.2 C5.1 C6.1 C7.2 C8.1 C9.2 C12.1 C13.1 C14.1 C15.1 C16.1 C17.1 C18.1 C19.1 D1.1 D2.1 D3.1 D4.1 J1.0 J1.3 J2.5 J2.S J3.0 J3.3 J4.6 J5.S P2.4 P3.3 P4.5 P5.2 P6.5 P7.5 P7.6 P8.11 P8.12 P9.9 P9.10 P10.5 P11.3 P11.4 P11.37 P11.38 P12.5 pad.1 pad.2 R32.1 R41.2 R45.1 U1.7 U1.18 U1.21 U1.25 U1.26 U2.2 U6.2 U8.4 U9.3 U9.9 U9.14 U9.16 U9.19 U9.23 U9.29 U9.48 Y1.2 | length 48.1
  Top Layer w0.2: U1.7 50.2,112.125 C4.2 ; v1(59.684,50.114) 62.001,50.114 62.179,49.936 62.179,48.574 62.154,48.549 U9.3 ; v1(78.207,80.289) 78.359,82.8 U2.2 ; C7.2 91.522,80.453 v1(91.686,80.289) ; v1(103.982,39.382) 104.9,38.463 J4.6
  Bottom Layer w0.2: C15.1 58.1,49.794 58.42,50.114 v1(59.684,50.114) ; v1(78.207,80.289) v1(91.686,80.289) ; P8.12 91.033,56.06 P9.9 P9.10
  other v1: 103.7,44 65.1,48 57.3,55.3 59.7,60 46.9,60.1
GPIO0_0: D5.1 P11.5 | length 20.2
  Top Layer w0.2: D5.1 108.204,100.739 108.204,93.716 108.702,93.218 109.855,93.218 110.236,92.837 110.236,91.567 109.855,91.186 107.696,91.186 P11.5
GPIO0_9: P10.2 P11.14 U8.5 U9.35 | length 95.5
  Top Layer w0.2: U9.35 71.982,49.049 v1(71.984,49.047) ; U8.5 98.54,83.922 ; P10.2 98.54,83.922 ; v1(101.422,83.058) 100.025,84.455 99.073,84.455 98.54,83.922
  Bottom Layer w0.2: v1(71.984,49.047) 77.8,54.864 104.953,54.864 105.639,55.55 109.906,55.55 110.236,55.88 110.236,81.026 P11.14 108.204,82.042 107.188,83.058 v1(101.422,83.058)
GPIO0_10: P10.3 P11.15 U8.2 U9.34 | length 106.3
  Top Layer w0.2: U9.34 70.907,48.549 v1(71.044,48.412) ; U8.2 U8.2@94.742,78.858 ; v1(95.3,80.3) 94.742,79.742 U8.2@94.742,78.858 ; P10.3 96,96.502 93.045,96.502 91.922,95.379 91.922,95.085 91.335,94.498 91.041,94.498 89,92.457 89,80.3 89.9,79.4 94.2,79.4 U8.2@94.742,78.858
  Bottom Layer w0.2: v1(71.044,48.412) 71.044,71.171 73.609,73.736 81.585,73.736 85.42,77.572 104.75,77.572 P11.15 105.882,80.3 v1(95.3,80.3)
GPIO0_12: P10.4 P11.17 U8.6 U9.33 | length 94
  Top Layer w0.2: v1(67.945,49.581) 67.945,48.366 68.263,48.049 U9.33 ; P10.4 93.46,86.74 96.012,84.188 U8.6 ; v1(100.051,78.486) 98.857,78.486 96.012,81.331 U8.6 ; P11.17 100.348,76.962 96.012,81.298 U8.6
  Bottom Layer w0.2: v1(67.945,49.581) 67.945,71.577 74.854,78.486 v1(100.051,78.486)
GPIO0_14: P11.19 P12.3 U9.32 | length 79.2
  Top Layer w0.2: U9.32 v1(71.526,47.549)
  Bottom Layer w0.2: v1(71.526,47.549) 71.914,47.936 72.2,47.65 72.593,47.65 ; P12.3 86.51,47.65 72.593,47.65 ; P11.19 93.066,74.422 89.484,70.841 76.149,70.841 71.425,66.116 71.425,48.819 72.593,47.65
GPIO0_17: P11.22
GPIO0_23: J4.1 P11.28 | length 34.9
  Top Layer w0.2: J4.1 99.4,38.252 98.7,38.952 98.7,59.1 102.338,62.738 105.538,62.738 107.696,62.738 P11.28
GPIO0_24: J4.2 P11.29 | length 29.3
  Top Layer w0.2: J4.2 100.5,59.1 103.122,61.722 P11.29
GPIO0_25: J4.3 P11.30 | length 30.4
  Top Layer w0.2: J4.3 101.6,38.43 101.6,58.5 103.6,60.5 104.8,60.5 107.998,60.5 P11.30
GPIO0_26: J4.5 P11.31 | length 25.5
  Top Layer w0.2: J4.5 103.8,38.3 102.9,39.2 102.9,58 104.082,59.182 P11.31
GPIO0_27: J4.7 P11.32 | length 26.7
  Top Layer w0.2: J4.7 106,38.6 104.5,40.1 104.5,57.9 104.7,58.1 108.138,58.1 P11.32
GPIO0_28: J4.8 P11.33 | length 20.9
  Top Layer w0.2: P11.33 106.68,55.74 105.2,54.26 105.2,40.698 106.352,39.546 106.352,39.178 107.1,38.43 J4.8
KBD_CLOCK: J3.5 P6.4 R12.1 U4.3 | length 17.9
  Top Layer w0.2: P6.4 43.815,82.671 43.815,81.952 44.133,81.635 44.526,81.635 ; R12.1 44.228,81.337 44.526,81.635 ; U4.3 44.526,81.635
  Bottom Layer w0.2: J3.5 34.001,85.699 P6.4
KBD_DATA: J3.1 P6.2 R8.1 U3.3 | length 19.7
  Top Layer w0.2: P6.2 41.422,91.414 U3.3 44.343,88.099 44.355,88.087 R8.1
  Bottom Layer w0.2: J3.1 32.279,90.779 P6.2
MOUSE_CLOCK: J1.5 P4.4 R22.1 U7.3 | length 17.2
  Top Layer w0.2: J1.5 33,70.67 36.83,74.5 P4.4 40.75,76.75 R22.1 43.18,76.75 43.7,76.23 U7.3
MOUSE_DATA: J1.1 P4.2 R18.1 U5.3 | length 21.3
  Top Layer w0.2: P4.2 40.352,71.272 44.767,71.272 45.22,70.82 R18.1 45.22,67.31 45.627,66.903 U5.3
  Bottom Layer w0.2: J1.1 36.52,71.4 P4.2
NetC1_1: C1.1 U1.17 | length 3.7
  Top Layer w0.2: C1.1 45.6,103.046 46.652,104.098 46.652,104.927 U1.17
NetC9_1: C9.1 R33.2 R34.1 | length 5.8
  Top Layer w0.2: R34.1 49.987,44.25 50.85,45.113 R33.2 50.85,47.196 50.7,47.346 C9.1
NetC12_2: C12.2 U9.22 | length 6.5
  Top Layer w0.2: U9.22 66.909,41.402 66.934,41.377 69.549,41.377 70.362,40.564 C12.2
NetC13_2: C13.2 U9.20 | length 3.6
  Top Layer w0.2: C13.2 65.663,40.8 65.909,41.046 U9.20
NetD5_2: D5.2 R32.2 | length 3
  Top Layer w0.2: D5.2 R32.2
NetJ5_L2: J5.L2 R43.1 | length 56.2
  Top Layer w0.2: v1(74.8,44.8) 75.7,44.8 75.7,43.277 76.327,42.65 R43.1
  Bottom Layer w0.2: J5.L2 28.698,45.898 37.465,45.898 44.348,39.014 50.134,44.8 v1(74.8,44.8)
NetJ5_L4: J5.L4 R42.1 | length 63.9
  Top Layer w0.2: v1(75.6,39.59) R42.1
  Bottom Layer w0.2: J5.L4 29.84,57.15 33.833,57.15 34.798,58.115 62.585,58.115 65.839,54.861 65.839,49.761 68.9,46.7 74,46.7 75.6,45.1 v1(75.6,39.59)
NetR2_1: R2.1 U1.14 | length 3.3
  Top Layer w0.2: R2.1 45.5,113.715 45.575,113.64 U1.14
NetR3_2: R3.2 U1.19 | length 3
  Top Layer w0.2: U1.19 48.398,104.927 48.398,104.098 48.6,103.896 R3.2
NetR4_2: R4.2 R6.2 U2.3 | length 6.7
  Top Layer w0.2: R6.2 74.75,81.864 75.895,81.864 75.909,81.85 U2.3@77.089,81.85 ; U2.3 U2.3@77.089,81.85 ; R4.2 77.089,78.65 U2.3@77.089,81.85
NetR5_2: R5.2 U2.1 | length 4.5
  Top Layer w0.2: U2.1 79.579,80.9 79.959,81.28 79.959,82.233 80.277,82.55 R5.2
NetR9_2: R9.2 R14.2 U6.3 | length 6.3
  Top Layer w0.2: R9.2 68.58,95.95 68.58,98.15 R14.2 71.64,98.15 72,97.79 U6.3
NetR15_2: R15.2 U6.1 | length 2.7
  Top Layer w0.2: U6.1 75.344,96.35 75.362,96.368 76.65,96.368 R15.2
NetR28_1: R28.1 U8.3 | length 2.5
  Top Layer w0.2: U8.3 96.012,75.45 R28.1
NetR29_1: R29.1 U8.7 | length 4.1
  Top Layer w0.2: R29.1 92.65,85.036 93.027,84.658 93.52,84.658 94.742,83.436 U8.7
NetR38_1: R38.1 U9.43 | length 4.6
  Top Layer w0.2: U9.43 64.909,55.042 64.936,55.069 R38.1
NetR39_1: R39.1 U9.44 | length 5.3
  Top Layer w0.2: R39.1 63.906,55.057 64.409,54.554 U9.44
NetR40_1: R40.1 U9.45 | length 6
  Top Layer w0.2: R40.1 61.049,55.057 63.909,52.197 U9.45
NetR41_1: R41.1 U9.10 | length 3.8
  Top Layer w0.2: R41.1 57.95,43.233 59.766,45.049 U9.10
NetR42_2: R42.2 U9.25 | length 8.9
  Top Layer w0.2: U9.25 73.952,44.049 76.911,41.09 R42.2
NetR43_2: R43.2 U9.27 | length 20.4
  Top Layer w0.2: U9.27 68.174,45.049 68.148,45.024 68.148,43.739 73.457,38.43 77.153,38.43 77.724,39.002 77.724,44.125 77.699,44.15 R43.2
PWM_LEFT: C5.2 P7.2 R6.1 | length 8.4
  Top Layer w0.2: C5.2 69.35,82.448 R6.1@72.05,82.448 ; R6.1 R6.1@72.05,82.448 ; P7.2 72.05,86.65 R6.1@72.05,82.448
PWM_RIGHT: C6.2 P7.4 R9.1 | length 8.1
  Top Layer w0.2: C6.2 C6.2@67.843,90.85 ; R9.1 67.843,93.25 C6.2@67.843,90.85 ; P7.4 70.41,90.85 C6.2@67.843,90.85
RDN: C11.1 J5.R8 | length 10
  Top Layer w0.2: J5.R8 43.11,43.42 50.886,43.42 50.9,43.434 C11.1
RDP: C10.1 J5.R7 | length 14.1
  Top Layer w0.2: J5.R7 39.35,44.786 41.997,42.139 50.739,42.139 50.9,42.3 C10.1
RXN: C11.2 R33.1 U9.5 | length 11.4
  Top Layer w0.2: C11.2 52.3,43.942 52.35,43.942 R33.1 52.35,46.025 58.242,46.025 59.766,47.549 U9.5
RXP: C10.2 R34.2 U9.6 | length 15.3
  Top Layer w0.2: R34.2 49.327,42.75 49.327,42.977 52.3,42.977 C10.2 53.167,42 55.642,44.475 57.396,44.475 59.969,47.049 U9.6
SPDLED: U9.24
TDN: J5.R2 R35.1 U9.1 | length 30.4
  Top Layer w0.2: J5.R2 38.901,52.26 38.329,52.832 38.329,54.407 38.735,54.813 51.156,54.813 54.619,51.35 R35.1 56.693,51.35 58.494,49.549 U9.1
TDP: J5.R1 R36.2 U9.2 | length 25.4
  Top Layer w0.2: J5.R1 48.67,53.53 52,50.2 52.15,50.2 R36.2 ; R36.2@54.85,47.15 R36.2 ; U9.2 59.766,49.049 57.867,47.15 R36.2
USBDM: J2.2 U1.16 | length 18.2
  Top Layer w0.2: J2.2 43.677,109.05 46.225,106.502 U1.16
USBDP: J2.3 U1.15 | length 16.4
  Top Layer w0.2: J2.3 42.325,108.4 U1.15
VGA_B: P8.5 P8.6 R26.2 R27.2 R30.2 | length 21.4
  Top Layer w0.2: P8.6 78.715,62.655 78.715,57.671 79.057,57.328 86.693,57.328 87.188,56.832 R27.2 87.188,55.702 87.173,55.687 87.173,54.664 R26.2 R30.2
  Bottom Layer w0.2: P8.5 77.223,63.703 79.717,63.703 P8.6
VGA_G: P8.3 P8.4 R23.2 R24.2 R25.2 | length 14.1
  Top Layer w0.2: P8.4 86.677,66.22 87.061,65.836 R23.2 87.061,64.338 87.046,64.323 87.046,63.173 R24.2 R25.2
  Bottom Layer w0.2: P8.3 P8.4
VGA_HSYNC: P8.7 P8.8 R10.1 | length 6.5
  Top Layer w0.2: P8.8 80.448,60.432 R10.1
  Bottom Layer w0.2: P8.7 77.223,61.163 79.717,61.163 P8.8
VGA_R: P8.1 P8.2 R16.2 R19.2 R20.2 | length 13.6
  Top Layer w0.2: P8.2 86.677,68.76 87.061,69.143 R20.2 R19.2 87.046,71.301 87.046,72.197 87.061,72.212 R16.2
  Bottom Layer w0.2: P8.1 77.2,68.783 78.869,68.783 78.892,68.76 P8.2
VGA_VSYNC: P8.9 P8.10 R13.1 | length 12.2
  Top Layer w0.2: R13.1 71.05,61.55 74,58.6 P8.9
  Bottom Layer w0.2: P8.9 P8.10
W5500_25M: P12.4 U9.30 Y1.3 | length 23.2
  Top Layer w0.2: U9.30 71.129,46.549 72.085,45.593 77.153,45.593 77.563,46.004 Y1.3 82.072,42.22 P12.4
W5500_nINT: P12.2 U9.36 | length 21.5
  Top Layer w0.2: U9.36 69.457,49.451 70.326,49.451 70.975,50.1 86.6,50.1 P12.2
W5500_nRST: P12.1 R44.2 R45.2 U9.37 | length 28.4
  Top Layer w0.2: R45.2 R44.2 67.909,54.97 U9.37 88.241,50.999 P12.1
pads on no net: J1.2 J1.6 J2.4 J3.2 J3.6 J4.9 J4.10 J4.11 J4.12 J4.13 J4.14 J5.R4 J5.R5 J5.R6 P11.11 P11.12 P11.36 U1.2 U1.3 U1.6 U1.8 U1.9 U1.10 U1.11 U1.12 U1.13 U1.22 U1.24 U1.27 U1.28 U9.7 U9.12 U9.13 U9.18 U9.31 U9.38 U9.39 U9.40 U9.41 U9.42 U9.46 U9.47
copper on no net:
  other v1: 70.7,72.6

## Polygon pours and split planes (outlines as drawn)
GND on Bottom Layer "Top Layer-No Net1" (solid, pour order 1): 25,25 25,125 120,125 120,25
GND on Top Layer "Top Layer-No Net" (solid, pour order 0): 25,25 25,125 120,125 120,25

## Silkscreen, mask and mechanical layers (free items; w line width, h text height)
Top Overlay:
  text "3V RX TX GND" at 84.7,106.6 h0.81 r90
  text "3V" at 111.3,96.8 h0.81
  text "3V" at 115.5,96.8 h0.81
  text "GND" at 111.1,94.4 h0.81
  text "GND" at 115.2,94.4 h0.81
  text "LED0" at 111.1,91.8 h0.81
  text "TX" at 115.3,91.8 h0.81
  text "RX" at 111.7,89.4 h0.81
  text "KB_DA" at 115.3,89.4 h0.81
  text "M_DA" at 115.3,86.7 h0.81
  text "KB_C" at 111.6,86.6 h0.81
  text "M_C" at 111.5,82.1 h0.81
  text "MOSI" at 115.3,82.1 h0.81
  text "F_CS" at 115.4,79.3 h0.81
  text "MISO" at 111.5,79.2 h0.81
  text "SCK" at 111.4,76.3 h0.81
  text "R0" at 115.4,76.3 h0.81
  text "ETH_CS" at 111.3,73.9 h0.81
  text "R1" at 116.6,73.9 h0.81
  text "B0" at 111.5,71.5 h0.81
  text "R  G  B  HS VS GND" at 74.3,69.3 h0.81 r270
  text "B1" at 111.5,69 h0.81
  text "G0" at 115.3,69 h0.81
  text "G1" at 111.5,66.5 h0.81
  text "HSYNC" at 114.1,66.5 h0.81
  text "VSYNC" at 111.1,63.9 h0.81
  text "DAT2" at 115.7,63.9 h0.81
  text "DAT3" at 111,61.4 h0.81
  text "CMD" at 115.7,61.4 h0.81
  text "CLK" at 111,58.8 h0.81
  text "DAT0" at 115.8,58.8 h0.81
  text "DAT1" at 111.1,56.3 h0.81
  text "L" at 115.5,56.3 h0.81
  text "R" at 111.7,53.7 h0.81
  text "3V" at 111.5,51.2 h0.81
  text "3V" at 115.7,51.2 h0.81
  text "GND" at 111.3,48.8 h0.81
  text "GND" at 115.4,48.8 h0.81
  text "ArmleoPC Extension Board Rev 0.1 / (C) Arman Avetisyan 01.2019" at 35.3,27.1 h1.52
Mechanical 1:
  the board outline again, w0

## Text inside footprints (layer, text, board x,y; h text height)
P7: Top Overlay "6" at 72.6,93.7 h1.27 r90; Top Overlay "5" at 75,93.8 h1.27 r90; Top Overlay "2" at 72.568,84.12 h1.27 r90; Top Overlay "1" at 75.108,84.628 h1.27 r90
P8: Top Overlay "12" at 79.232,54.028 h1.27 r270; Top Overlay "1" at 76.692,53.012 h1.27 r270; Top Overlay "1" at 76.692,54.028 h1.27 r270; Top Overlay "1" at 76.692,71.3 h1.27 r270; Top Overlay "2" at 79.232,71.3 h1.27 r270
P9: Top Overlay "2" at 94.571,70.266 h1.27 r270; Top Overlay "1" at 92.031,69.758 h1.27 r270; Top Overlay "9" at 92.031,56.042 h1.27 r270; Top Overlay "10" at 94.571,56.042 h1.27 r270
P11: Top Overlay "39" at 106.172,46.99 h1.27 r270; Top Overlay "40" at 108.712,46.99 h1.27 r270; Top Overlay "2" at 108.712,99.822 h1.27 r270; Top Overlay "1" at 106.172,99.822 h1.27 r270